# Altium PCB tc2050.PcbDoc
Units mil, origin at the board's own origin, x right, y up, seen from the top; angles counter-clockwise.
Board outline 6000 x 4000 mil, 2 copper layers (Top Layer, Bottom Layer); 1 components, 0 nets, 17 pads, 0 vias.
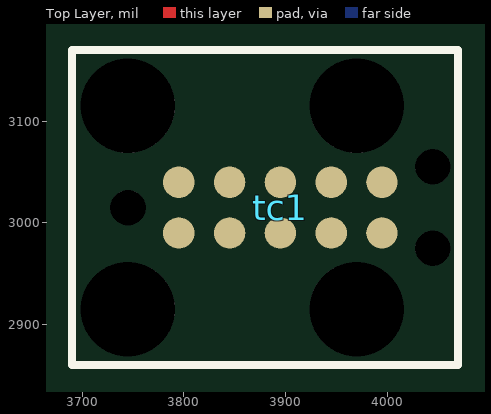
[diagram p0: Top Layer view]
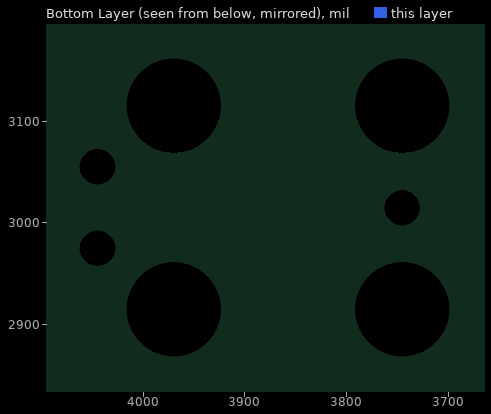
[diagram p1: Bottom Layer view, seen from below]

## Layer stack, top to bottom
Top Layer: signal copper 1.4
Dielectric: dielectric 12.6, FR-4, Dk 4.8
Bottom Layer: signal copper 1.4

## Board outline
1000,1000 7000,1000 7000,5000 1000,5000

## Design rules (kind name [scope] priority, off if disabled: settings)
Clearance [All] p1: gap=10
PolygonConnect [All] p1: connectstyle=Relief reliefconductorwidth=10 reliefentries=4 polygonreliefangle="90 Angle"
RoutingVias [All] p1: holewidth=28 width=50 viastyle="Through Hole" minholewidth=28 minwidth=50 maxholewidth=28 maxwidth=50
SilkscreenOverComponentPads [All] p1: minsilkscreentomaskgap=10
SolderMaskExpansion [All] p1: expansion=4
Width [All] p1: maxlimit=10 minlimit=10 preferedwidth=10
27 further rules are at their usual default settings.

## Components (designator, comment, footprint, x,y, rotation, side; value= is the part's Value field where it differs from the comment)
tc1 "Comment" TC2050-IDC-FP 3745,3015 r0 top

## Footprints (in the part's own frame and the unit in brackets; to place one, negate y for a bottom-side part, rotate by r counter-clockwise, add the part's x,y. Pads: shape width x height; smd on the part's side, far side on the other; paste and mask are expansions set on the pad)
TC2050-IDC-FP [mil] "footprint for test cable"
  round 31 smd paste-40: 1(50,-25) 2(100,-25) 3(150,-25) 4(200,-25) 5(250,-25) 6(250,25) 7(200,25) 8(150,25) 9(100,25) 10(50,25)
  round 34 hole 35 unplated: A(0,0) B(300,40) C(300,-40)
  round 92 hole 93 unplated: D(0,-100) E(225,-100) F(0,100) G(225,100)
  silkscreen extent -55,-155 325,155

## Nets (pads, with @x,y where several pads share a name; then routed paths per layer and width w, separated by ;. In a path a pad name is that pad's centre, name@x,y a point inside that pad or via, vN(x,y) a via of type N, cw(c..) or ccw(c..) an arc to the next point about the centre after c; other vN are vias at no path point)
pads on no net: tc1.1 tc1.2 tc1.3 tc1.4 tc1.5 tc1.6 tc1.7 tc1.8 tc1.9 tc1.10 tc1.A tc1.B tc1.C tc1.D tc1.E tc1.F tc1.G

## Text inside footprints (layer, text, board x,y; h text height)
tc1: Mechanical 1 "keepout" at 3870,3010 h20